# Altium PCB battery.PcbDoc
Units mm, origin at the board's own origin, x right, y up, seen from the top; angles counter-clockwise.
Board outline 152.4 x 101.6 mm, 2 copper layers (Top Layer, Bottom Layer); 2 components, 0 nets, 6 pads, 0 vias.
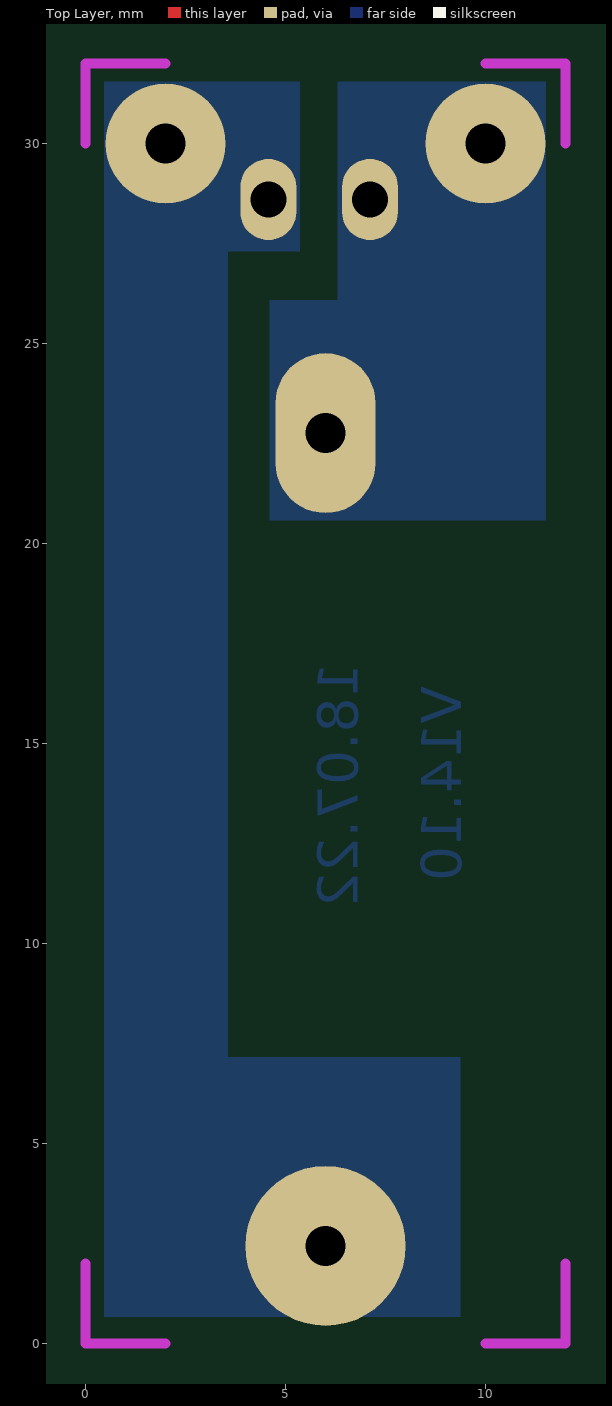
[diagram p0: Top Layer view]
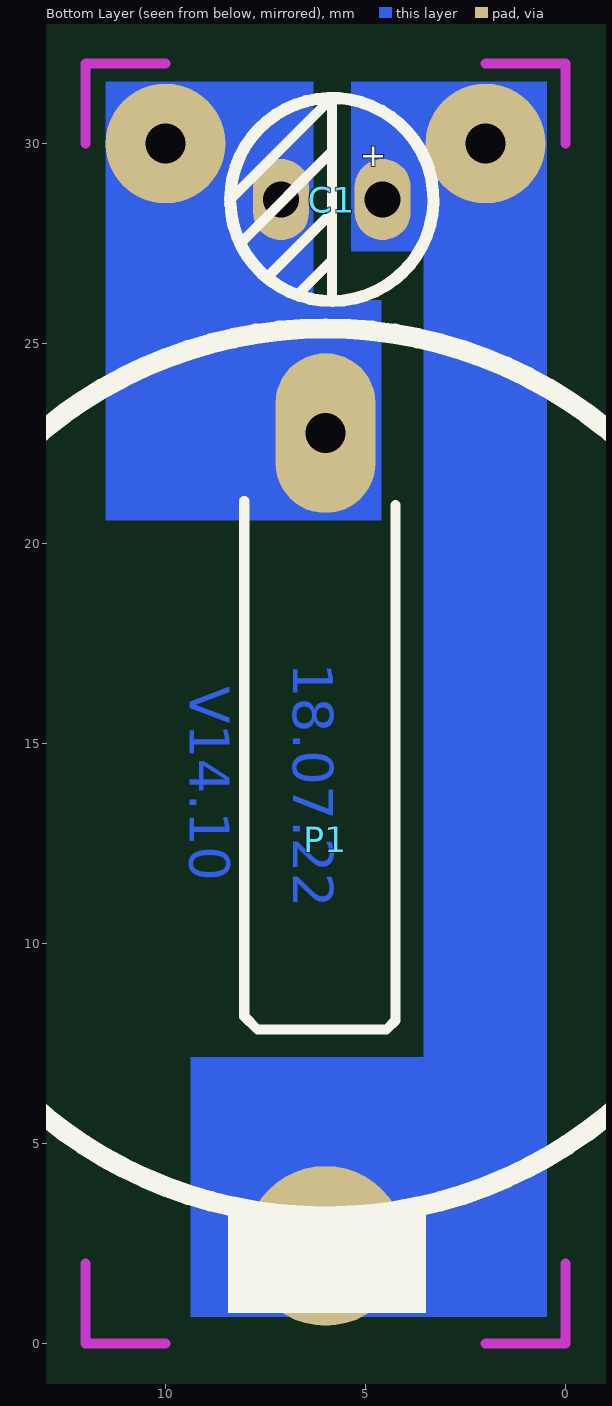
[diagram p1: Bottom Layer view, seen from below]

## Layer stack, top to bottom
Top Solder: solder mask 0.0102, Solder Resist, Dk 3.5
Top Layer: signal copper 0.0356
Dielectric 1: dielectric 0.32, FR-4, Dk 4.8
Bottom Layer: signal copper 0.0356
Bottom Solder: solder mask 0.0102, Solder Resist, Dk 3.5

## Board outline
-59.614,-56.896 92.786,-56.896 92.786,44.704 -59.614,44.704

## Design rules (kind name [scope] priority, off if disabled: settings)
Clearance [All] p1: gap=0.254
PolygonConnect [All] p1: connectstyle=Relief reliefconductorwidth=0.254 reliefentries=4 polygonreliefangle="90 Angle" airgapwidth=0.254
RoutingVias [All] p1: holewidth=0.711 width=1.27 viastyle="Through Hole" minholewidth=0.711 minwidth=1.27 maxholewidth=0.711 maxwidth=1.27
SolderMaskExpansion [All] p1: expansion=0.102
Width [All] p1: maxlimit=0.254 minlimit=0.254 preferedwidth=0.254
29 further rules are at their usual default settings.

## Components (designator, comment, footprint, x,y, rotation, side; value= is the part's Value field where it differs from the comment)
C1 "47uF/6.3V" RB.1/.2 5.842,28.6 r0 bottom
P1 "Battery holder" BATHOL22 6,12.6 r90 bottom locked

## Footprints (in the part's own frame and the unit in brackets; to place one, negate y for a bottom-side part, rotate by r counter-clockwise, add the part's x,y. Pads: shape width x height; smd on the part's side, far side on the other; paste and mask are expansions set on the pad)
BATHOL22 [mm] "battery holder 22mm"
  round 4 hole 1: 1(-10.16,0)
  oval 4x2.5 hole 1: 2(10.16,0)
  silkscreen extent -11.84,-11.1 12.78,11.1
RB.1/.2 [mil]
  oval 55x80 hole 35.43: 1(-50,0) 2(50,0)
  silkscreen extent -100,-100 100,100

## Part data
C1: library part "Cap Pol1", "Polarized Capacitor (SMD)"
P1: library part "Header 2", "Header, 2-Pin"

## Free pads (board coordinates)
  round 3 hole 1: 4(10,30) 5(2,30)

## Nets (pads, with @x,y where several pads share a name; then routed paths per layer and width w, separated by ;. In a path a pad name is that pad's centre, name@x,y a point inside that pad or via, vN(x,y) a via of type N, cw(c..) or ccw(c..) an arc to the next point about the centre after c; other vN are vias at no path point)
pads on no net: C1.1 C1.2 P1.1 P1.2
copper on no net: | length 28.9
  Bottom Layer w2.54: 2,30 1.976,29.976 1.976,5.361 5,2.337

## Keep-outs
Keep-Out Layer:
  lines w0.254: 0,2 0,0 2,0 ; 0,30 0,32 2,32 ; 10,0 12,0 12,2 ; 10,32 12,32 12,30

## Other copper
Bottom Layer:
  rectangle: 6.299,20.574 11.506,31.547
  rectangle: 4.597,20.574 6.299,26.086
  rectangle: 0.457,0.66 9.373,7.163
  rectangle: 0.457,7.163 3.556,31.547
  rectangle: 3.556,27.305 5.359,31.547
  text "18.07.22" at 6.807,17.018 h1 r90
  text "V14.10" at 9.398,16.434 h1 r90

## Text inside footprints (layer, text, board x,y; h text height)
C1: Bottom Overlay "+" at 4.47,30.124 h1 r180